# Altium PCB czujnik.PcbDoc
Units mm, origin at the board's own origin, x right, y up, seen from the top; angles counter-clockwise.
Board outline 46.23 x 39.24 mm, 2 copper layers (Top Layer, Bottom Layer); 4 components, 8 nets, 26 pads, 2 vias.
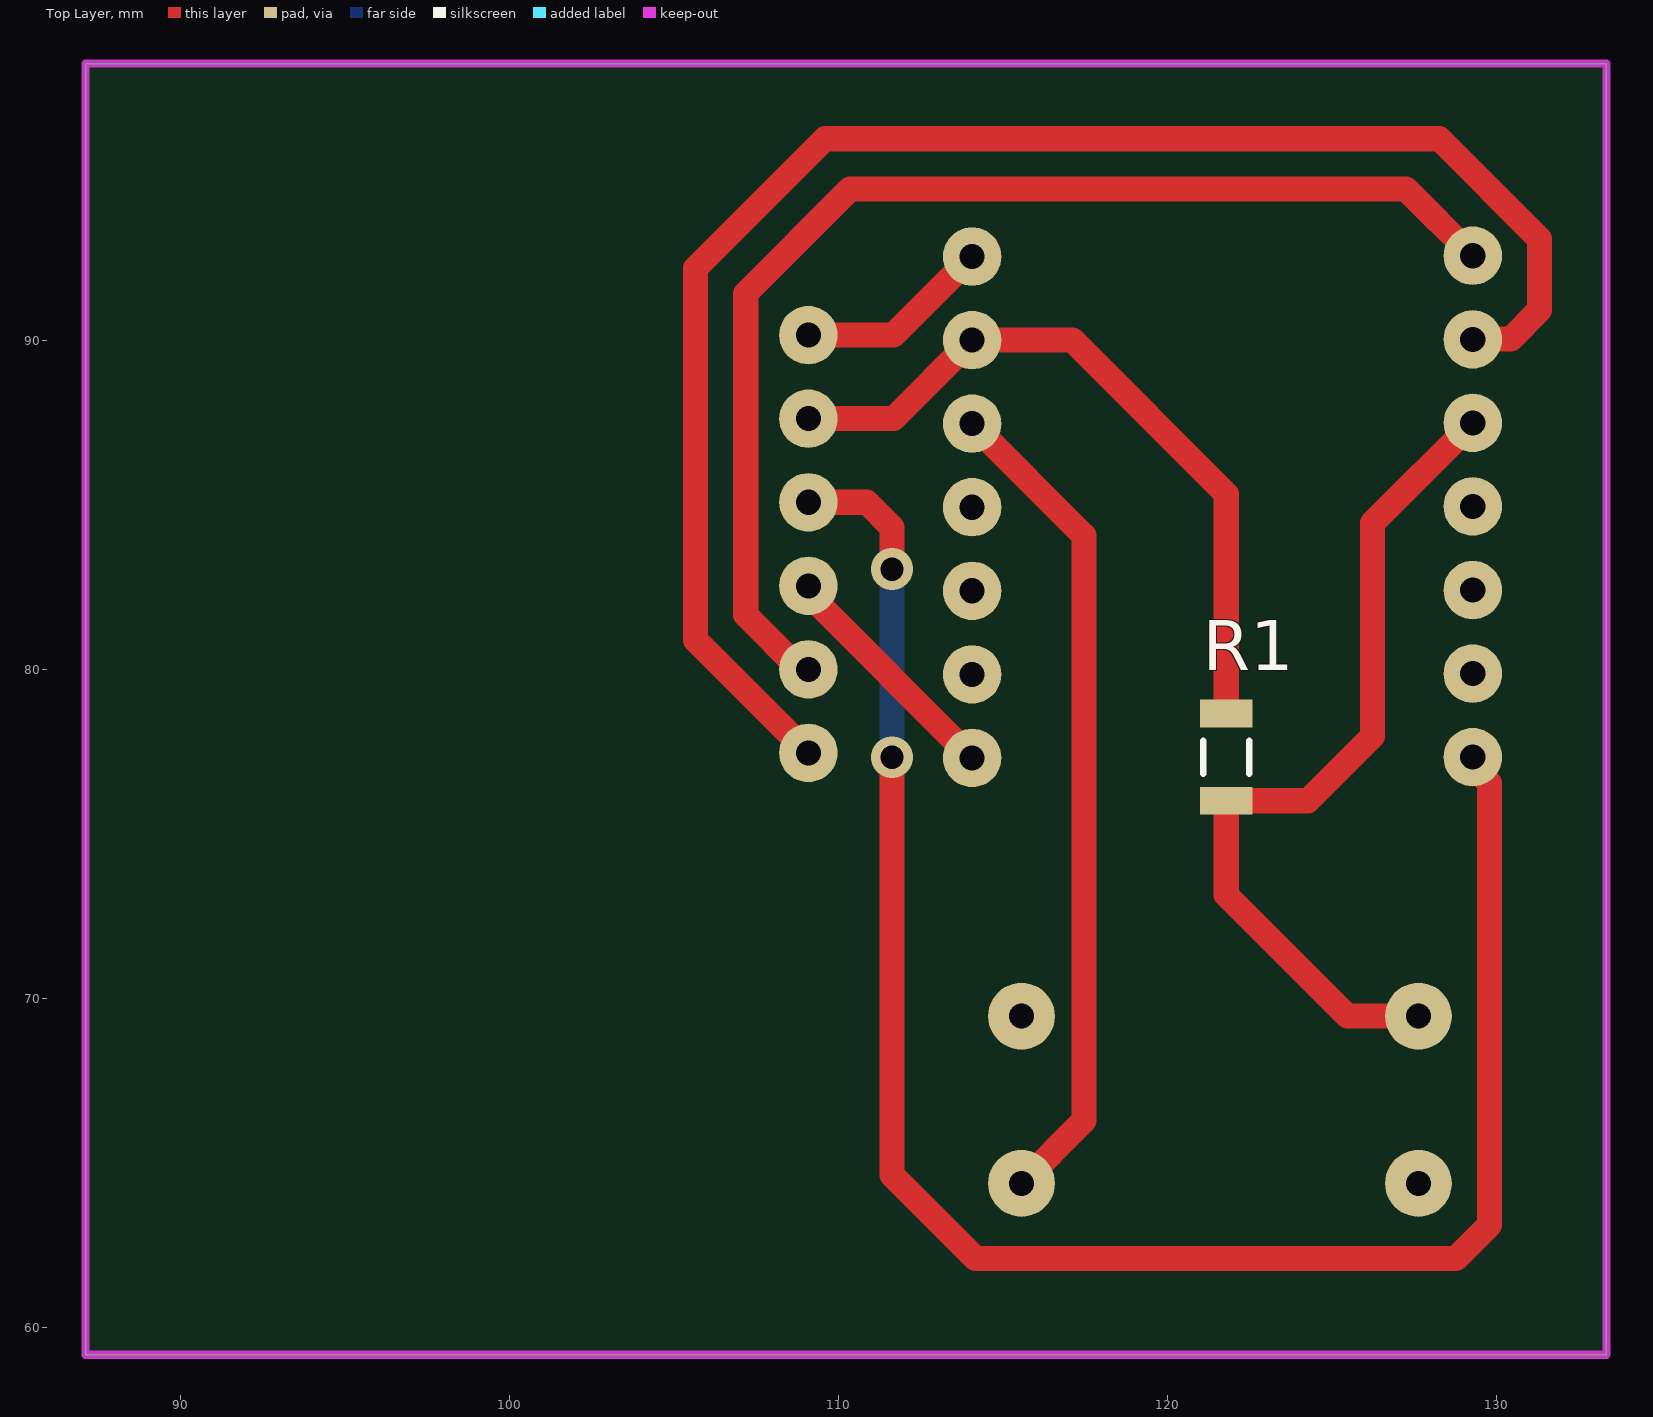
[diagram p0: Top Layer view]
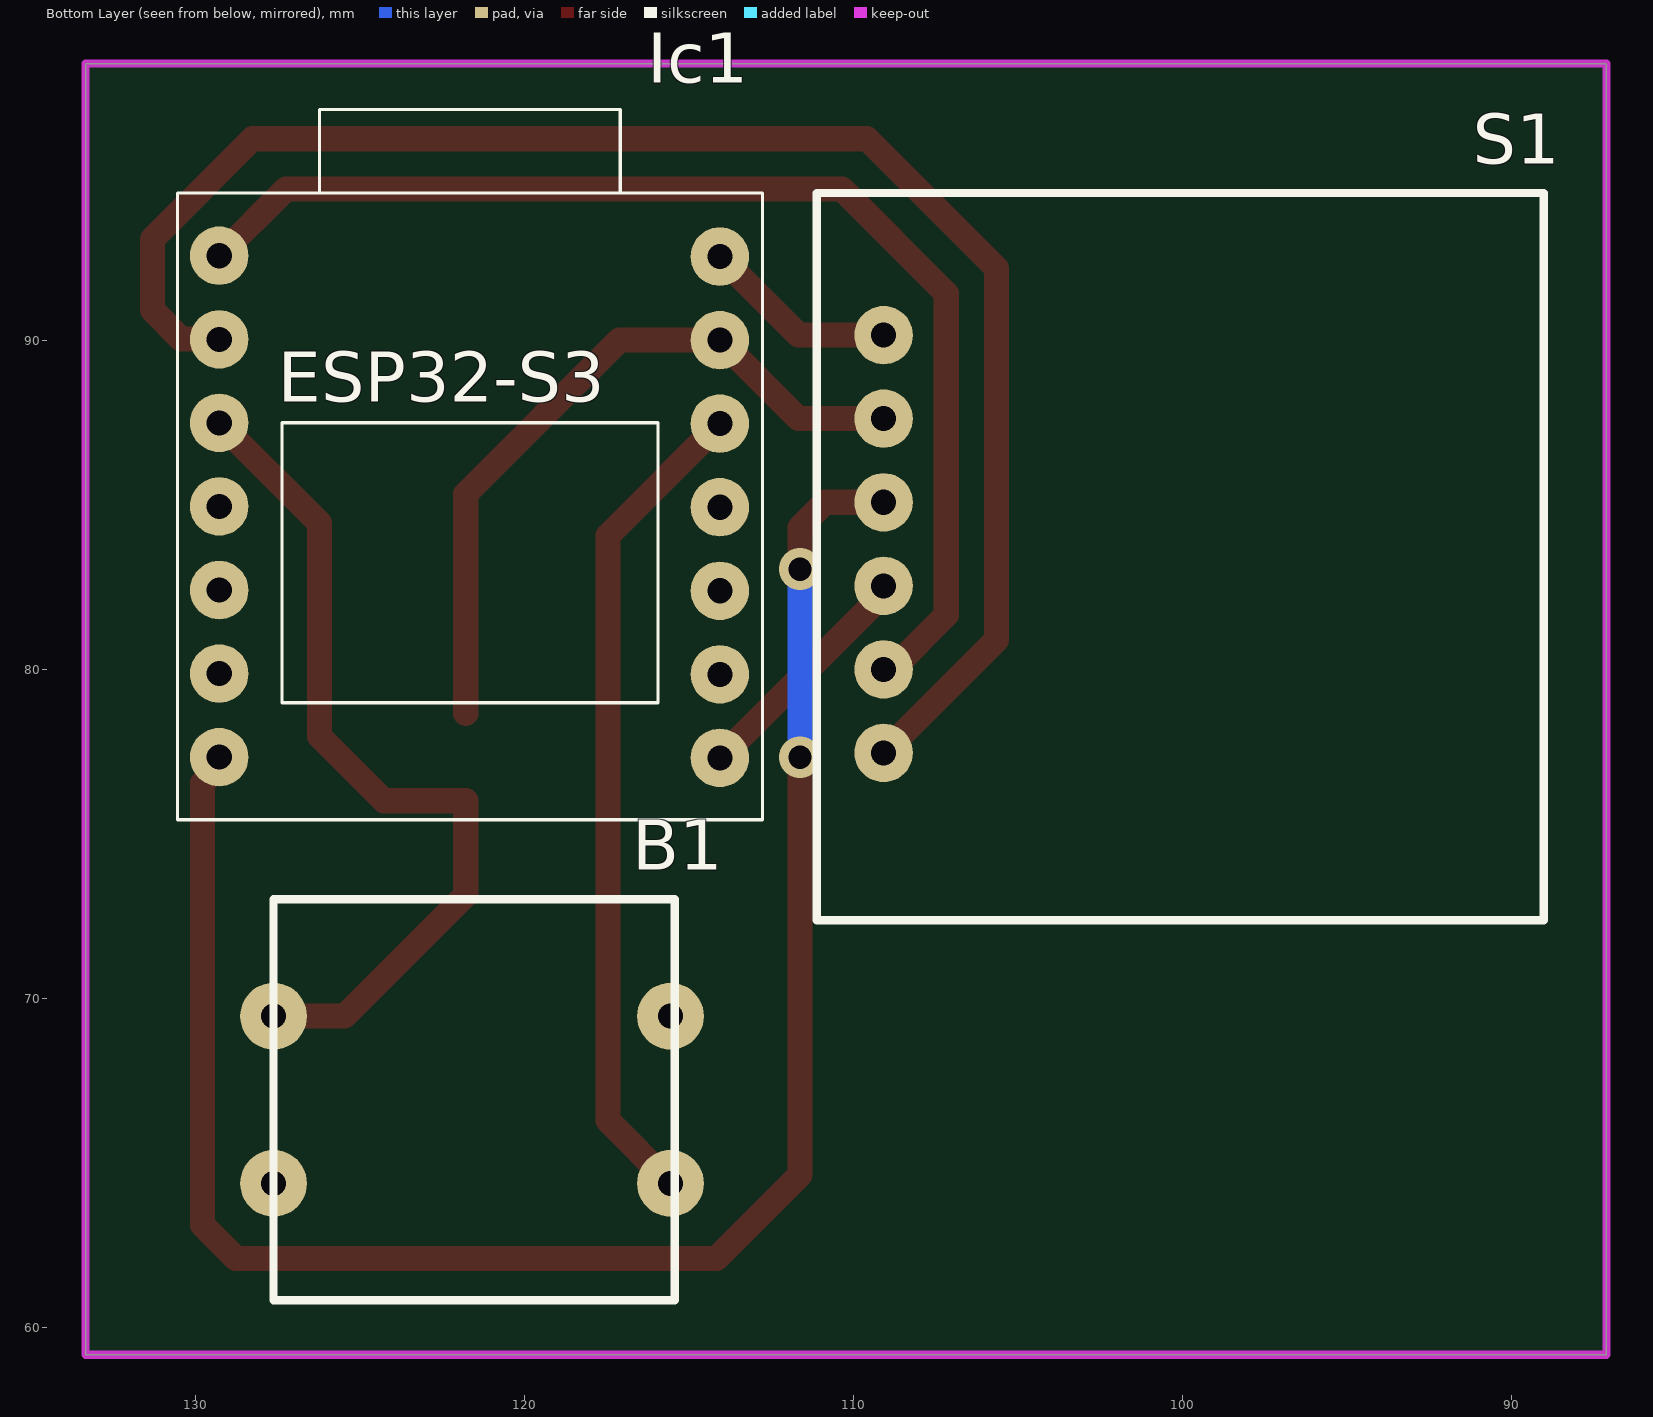
[diagram p1: Bottom Layer view, seen from below]

## Layer stack, top to bottom
Top Solder: solder mask 0.0102, Solder Resist, Dk 3.5
Top Layer: signal copper 0.0356
Dielectric 1: dielectric 0.32, FR-4, Dk 4.8
Bottom Layer: signal copper 0.0356
Bottom Solder: solder mask 0.0102, Solder Resist, Dk 3.5

## Board outline
87.122,59.182 87.122,98.425 133.35,98.425 133.35,59.182

## Design rules (kind name [scope] priority, off if disabled: settings)
Clearance Clearance_1 [All] p1: gap=0.254 ignorepadtopadclearanceinfootprint=FALSE except(0: Arc-Hole Track-Hole SMDPad-Hole THPad-Hole Via-Hole Fill-Hole Poly-Hole Region-Hole Text-Hole)
Clearance [All] p2: gap=0.508 ignorepadtopadclearanceinfootprint=FALSE except(0: Arc-Hole Track-Hole SMDPad-Hole THPad-Hole Via-Hole Fill-Hole Poly-Hole Region-Hole Text-Hole)
PolygonConnect [All] p1: connectstyle=Relief reliefconductorwidth=0.254 reliefentries=4 polygonreliefangle="90 Angle" airgapwidth=0.254
RoutingVias [All] p1: holewidth=0.711 width=1.27 viastyle="Through Hole" minholewidth=0.711 minwidth=1.27 maxholewidth=0.711 maxwidth=1.27
SolderMaskExpansion [All] p1: expansion=0.102 istentingtop=FALSE
Width [All] p1: maxlimit=1.27 minlimit=0.254 preferedwidth=0.762 minimp=50.000000 maximp=50.000000 favimp=50.000000
30 further rules are at their usual default settings.

## Components (designator, comment, footprint, x,y, rotation, side; value= is the part's Value field where it differs from the comment)
B1 "button 12x12" button12x12 121.539,66.929 r0 bottom
Ic1 "ESP32-S3_xiao" ESP32-S3 121.666,84.963 r180 bottom
R1 "RC1206FR-10750RL" RESC3116X65X40LL10T20 121.793,77.343 r90 top
S1 "DFRobot C1001" C1001 109.093,90.17 r180 bottom (schematic designator S?)

## Footprints (in the part's own frame and the unit in brackets; to place one, negate y for a bottom-side part, rotate by r counter-clockwise, add the part's x,y. Pads: shape width x height; smd on the part's side, far side on the other; paste and mask are expansions set on the pad)
button12x12 [mil]
  round 80 hole 30: 1(-235,100) 2(240,100) 3(-235,-100) 4(240,-100)
  silkscreen extent -240,-240 240,240
C1001 [mil]
  round 70 hole 30: 1(0,0) 2(0,-100) 3(0,-200) 4(0,-300) 5(0,-400) 6(0,-500)
  silkscreen extent -80,-700 790,170
ESP32-S3 [mil]
  round 70 hole 30: 1(-300,300) 2(-300,200) 3(-300,100) 4(-300,0) 5(-300,-100) 6(-300,-200) 7(-300,-300) 8(299.07,-300.93) 9(299.07,-200.93) 10(299.07,-100.93) 11(299.07,-0.93) 12(299.07,99.07) 13(299.07,199.07) 14(299.07,299.07)
  silkscreen extent -350,-375 350,475
RESC3116X65X40LL10T20 [mm] "Chip Resistor, 2-Leads, Body 3.10x1.60mm, IPC High Density"
  rect 0.85x1.6 smd: 1(-1.325,0) 2(1.325,0)
  silkscreen extent -0.5,-0.7 0.5,0.7, body extent -1.6,-0.85 1.6,0.85, height 0.65

## Part data
B1: library part button12x12
R1: library part CMP-2003-04964-1, Manufacturer=Yageo, Part Number=RC1206FR-10750RL
S1: library part C1001

## Via types
v1: diameter 1.27, hole 0.711, Top Layer to Bottom Layer, 2 vias

## Nets (pads, with @x,y where several pads share a name; then routed paths per layer and width w, separated by ;. In a path a pad name is that pad's centre, name@x,y a point inside that pad or via, vN(x,y) a via of type N, cw(c..) or ccw(c..) an arc to the next point about the centre after c; other vN are vias at no path point)
GND: Ic1.13 R1.2 S1.2 | length 22.3
  Top Layer w0.762: S1.2 111.68,87.63 Ic1.13 117.118,90.019 121.793,85.344 R1.2
NetB1_1: B1.1 Ic1.12 | length 25.3
  Top Layer w0.762: Ic1.12 117.475,84.074 117.475,66.294 B1.1
NetB1_4: B1.4 Ic1.3 R1.1 | length 26.3
  Top Layer w0.762: B1.4 125.476,69.469 121.793,73.152 R1.1 124.278,76.018 126.238,77.978 126.238,84.455 Ic1.3
NetIc1_1: Ic1.1 S1.5 | length 36.6
  Top Layer w0.762: S1.5 108.839,80.01 107.188,81.661 107.188,91.44 110.363,94.615 127.254,94.615 Ic1.1
NetIc1_2: Ic1.2 S1.6 | length 49.3
  Top Layer w0.762: S1.6 105.664,80.899 105.664,92.202 109.601,96.139 128.27,96.139 131.318,93.091 131.318,90.932 130.443,90.057 129.3,90.057 Ic1.2
NetIc1_7: Ic1.7 S1.3 | length 56.6
  Top Layer w0.762: S1.3 110.871,85.09 111.633,84.328 v1(111.633,83.058) ; v1(111.633,77.343) 111.633,64.643 114.173,62.103 128.778,62.103 129.794,63.119 129.794,76.56 129.286,77.068 Ic1.7
  Bottom Layer w0.762: v1(111.633,77.343) v1(111.633,83.058)
NetIc1_8: Ic1.8 S1.4 | length 7.3
  Top Layer w0.762: S1.4 109.093,82.296 Ic1.8
NetIc1_14: Ic1.14 S1.1 | length 6
  Top Layer w0.762: S1.1 111.68,90.17 Ic1.14
pads on no net: B1.2 B1.3 Ic1.4 Ic1.5 Ic1.6 Ic1.9 Ic1.10 Ic1.11

## Keep-outs
Keep-Out Layer:
  the board outline again, w0.254

## Text inside footprints (layer, text, board x,y; h text height)
Ic1: Bottom Overlay "ESP32-S3" at 127.508,88.138 h1.52